# Altium PCB PCB1.PcbDoc
Units mil, origin at the board's own origin, x right, y up, seen from the top; angles counter-clockwise.
Board outline 6000 x 4000 mil, 2 copper layers (Top Layer, Bottom Layer); 23 components, 12 nets, 60 pads, 0 vias.
Unrouted connection lines stored in the file: 44.
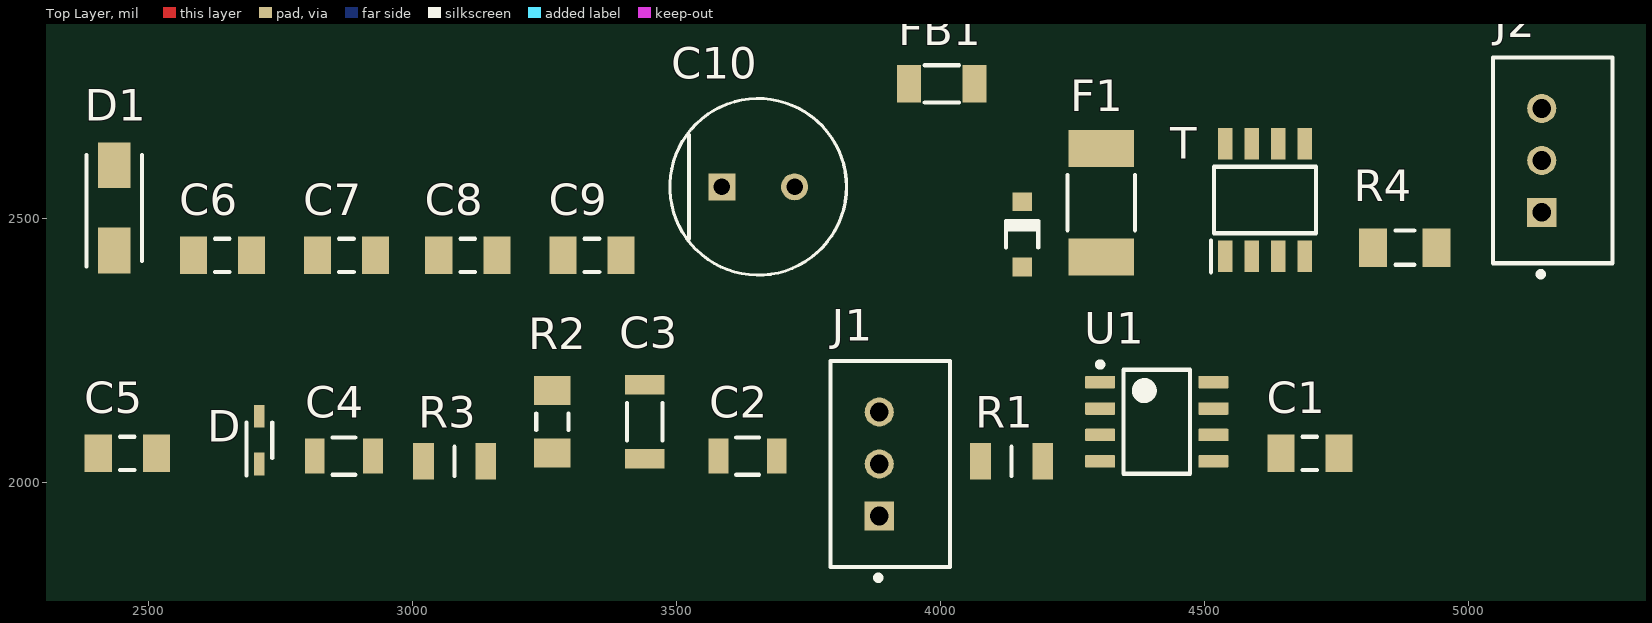
[diagram p0: Top Layer view]
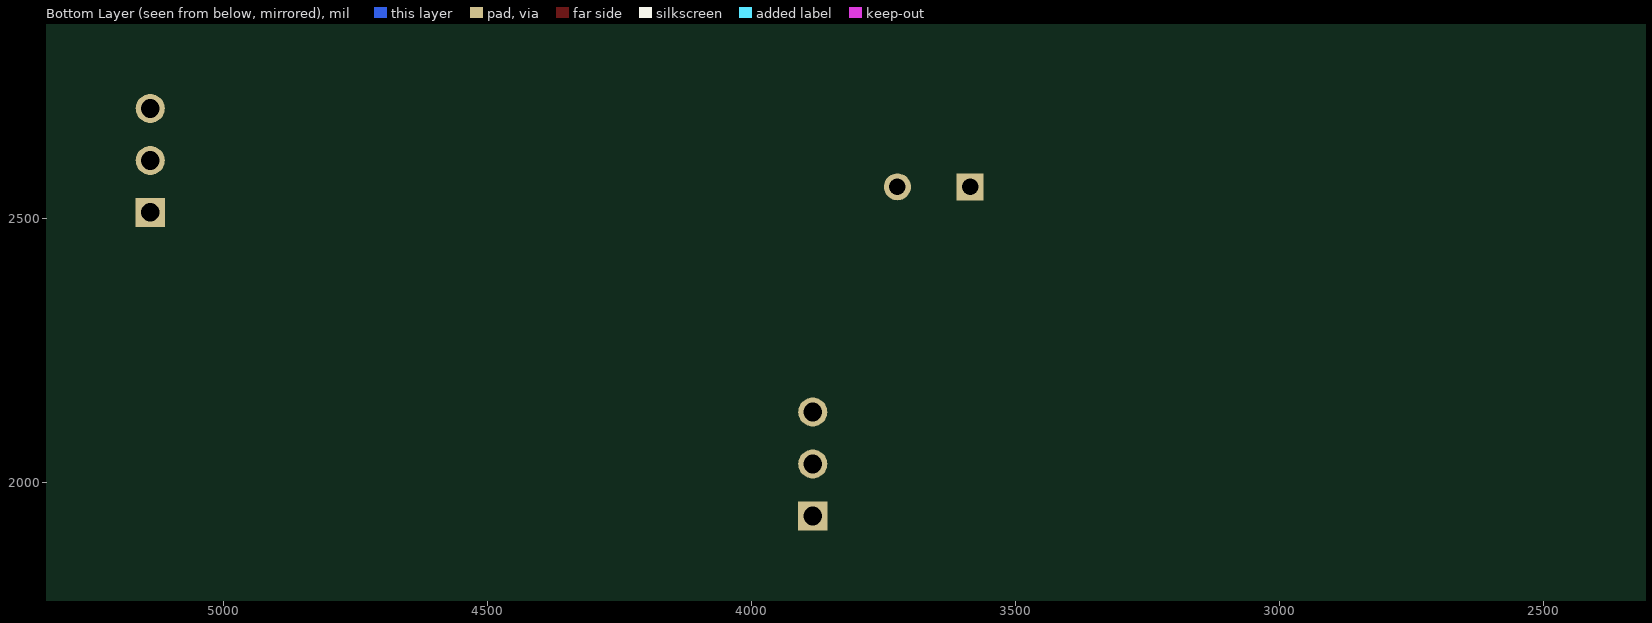
[diagram p1: Bottom Layer view, seen from below]

## Layer stack, top to bottom
Top Solder: solder mask 0.4, Solder Resist, Dk 3.5
Top Layer: signal copper 1.4
Dielectric 1: dielectric 12.6, FR-4, Dk 4.8
Bottom Layer: signal copper 1.4
Bottom Solder: solder mask 0.4, Solder Resist, Dk 3.5

## Board outline
1000,1000 7000,1000 7000,5000 1000,5000

## Design rules (kind name [scope] priority, off if disabled: settings)
Clearance [All] p1: gap=10 ignorepadtopadclearanceinfootprint=FALSE
PolygonConnect [All] p1: connectstyle=Relief reliefconductorwidth=10 reliefentries=4 polygonreliefangle="90 Angle" airgapwidth=10
RoutingVias [All] p1: holewidth=28 width=50 viastyle="Through Hole" minholewidth=28 minwidth=50 maxholewidth=28 maxwidth=50
SolderMaskExpansion [All] p1: expansion=0 istentingtop=FALSE
SupplyNets "Schematic Supply Nets_2" [InNet('+9_IN1')] p1: voltage=0.000
SupplyNets "Schematic Supply Nets_1" [InNet('GND')] p2: voltage=0.000
SupplyNets "Schematic Supply Nets" [InNet('VBIAS')] p3: voltage=0.000
Width [All] p1: maxlimit=10 minlimit=10 preferedwidth=10
30 further rules are at their usual default settings.

## Classes and differential pairs
component class CONNECTION: C1 C2 C3 C4 C5 D J1 R1 R2 R3 U1

## Components (designator, comment, footprint, x,y, rotation, side; value= is the part's Value field where it differs from the comment)
C1 "C1206C104K5RACTU" KEMT-1206-2_N 4700,2055 r0 top value=100nF
C2 "C1206C223J5GACTU" FP-C1206C-EB-MFG 3635,2050 r0 top value=22nF
C3 "Capacitor 1 uF +/- 10% 25 V 1206" CAPC3216X180X20ML20 3440,2115 r90 top value=1µF
C4 "C1206C101J5GACTU" FP-C1206C-EB-MFG 2870,2050 r0 top value=100pF
C5 "Capacitor 10 uF +/- 10% 16 V 1206" CAPC3216X180X50NL20T25 2460,2055 r0 top value=10µF
C6 "C1206C104K5RACTU" KEMT-1206-2_N 2640,2430 r0 top value=100nF
C7 "Capacitor 10 uF +/- 10% 16 V 1206" CAPC3216X180X50NL20T25 2875,2430 r0 top value=10µF
C8 "C1206C104K5RACTU" KEMT-1206-2_N 3105,2430 r0 top value=100nF
C9 "Capacitor 10 uF +/- 10% 16 V 1206" CAPC3216X180X50NL20T25 3340,2430 r0 top value=10µF
C10 "EEUFR1E221" FP-RAD-TH-D_8_0_5-L_11_5-MFG 3655,2560 r0 top value=220µF
D "PESD5V0V1BA,115" PESD5V0V1BA,115-Footprint-1 2715,2080 r90 top
D1 "SMAJ12A" SMAJ12A-Footprint-1 2435,2520 r90 top
F1 "1812L075/24DR" LFUS-1812L07524DR_V 4305,2530 r90 top
FB1 "BLM31PG121SN1L" FP-BLM31-0_2-t1_1-MFG 4002.99,2755 r0 top
J1 "B3B-XH-A(LF)(SN)" FP-B3B-XH-A_LF_SN-MFG 3905,2035 r90 top
J2 "B3B-XH-A(LF)(SN)" FP-B3B-XH-A_LF_SN-MFG 5160,2610 r90 top
R1 "RC1206FR-071ML" RC1206FR-071ML-Footprint-1 4135,2040 r0 top value=1M
R2 "Resistor 1k +/-1% 1206 250 mW" RESC3116X70X50ML13T20 3265,2115 r90 top value=1k
R3 "RC1206FR-0710ML" RC1206FR-0710ML-Footprint-1 3080,2040 r0 top value=10M
R4 "Resistor 100k +/-1% 1206 250 mW" RESC3216X60X45ML15T20 4880,2445 r0 top value=100k
T "SI4491EDY-T1-GE3" SI4491EDY-T1-GE3-Footprint-1 4625,2535 r90 top
U1 "OPA1652AIDR" D0008A_N 4410,2115 r0 top
? "BZT52C12-7-F" DIOD-SOD123-2_V 4155,2470 r90 top

## Footprints (in the part's own frame and the unit in brackets; to place one, negate y for a bottom-side part, rotate by r counter-clockwise, add the part's x,y. Pads: shape width x height; smd on the part's side, far side on the other; paste and mask are expansions set on the pad)
CAPC3216X180X20ML20 [mm] "Chip Capacitor, 2-Leads, Body 3.40x1.80mm, IPC Low Density"
  rect 0.95x1.9 smd: 1(-1.775,0) 2(1.775,0)
  silkscreen extent -0.9,-0.85 0.9,0.85, body extent -1.7,-0.9 1.7,0.9, height 1.8
CAPC3216X180X50NL20T25 [mm] "Chip Capacitor, 2-Leads, Body 3.40x1.80mm, IPC Medium Density"
  rect 1.3x1.8 smd: 1(-1.4,0) 2(1.4,0)
  silkscreen extent -0.35,-0.8 0.35,0.8, body extent -1.7,-0.9 1.7,0.9, height 1.8
D0008A_N [mm] "SOIC, 8-Leads, Body 5x4mm, Pitch 1.27mm, IPC Medium Density"
  rrect17% 1.45x0.6 smd: 1(-2.725,1.905) 2(-2.725,0.635) 3(-2.725,-0.635) 4(-2.725,-1.905) 5(2.725,-1.905) 6(2.725,-0.635) 7(2.725,0.635) 8(2.725,1.905)
  silkscreen extent -2.85,-2.5 1.6,2.88, body extent -3,-2.45 3,2.45, height 1.63
DIOD-SOD123-2_V [mm] "SOD123, 2-Leads, Body 2.7x1.55mm, Height 1.45mm"
  rect 0.9x0.95 smd: 1(-1.575,0) 2(1.575,0)
  silkscreen extent -0.64,-0.83 0.64,0.77, body extent -1.35,-0.77 1.35,0.77, height 1.45
FP-B3B-XH-A_LF_SN-MFG [mm]
  rect 1.4x1.4 hole 0.9 paste-2539.97 mask+0: 1(-2.5,0.525)
  round 1.4 hole 0.9 paste-2539.97 mask+0: 2(0,0.525) 3(2.5,0.525)
  silkscreen extent -5.6,-2.88 4.95,2.88, body extent -5.05,-2.98 5.05,2.98, height 0.25
FP-BLM31-0_2-t1_1-MFG [mm]
  rect 1.15x1.8 smd paste+0 mask+0: 1(-1.575,0) 2(1.575,0)
  silkscreen extent -0.82,-0.9 0.82,0.9, body extent -2.25,-1 2.25,1, height 0.25
FP-C1206C-EB-MFG [mm]
  rect 0.95x1.7 smd paste+0 mask+0: 1(-1.4,0) 2(1.4,0)
  silkscreen extent -0.55,-0.9 0.55,0.9, body extent -2,-1 2,1, height 0.25
FP-RAD-TH-D_8_0_5-L_11_5-MFG [mm]
  rect 1.3x1.3 hole 0.8 paste-2539.97 mask+0: 1(-1.75,0)
  round 1.3 hole 0.8 paste-2539.97 mask+0: 2(1.75,0)
  silkscreen extent -4.25,-4.25 4.25,4.25, body extent -4.35,-4.35 4.35,4.35, height 0.25
KEMT-1206-2_N [mm] "SMD, 2-Leads, Body 3.4x1.8mm, IPC Medium Density"
  rect 1.3x1.8 smd: 1(-1.4,0) 2(1.4,0)
  silkscreen extent -0.35,-0.8 0.35,0.8, body extent -1.7,-0.9 1.7,0.9, height 0.88
LFUS-1812L07524DR_V [mm] "SMD, 2-Leads, Body 4.55x3.24mm"
  rect 1.78x3.15 smd: 1(-2.615,0) 2(2.615,0)
  silkscreen extent -1.33,-1.62 1.33,1.62, body extent -2.27,-1.62 2.27,1.62, height 1.55
PESD5V0V1BA,115-Footprint-1 [mm]
  rect 1.1x0.5 smd: 1(-1.15,0.127) 2(1.15,0.127)
  silkscreen extent -1.7,-0.5 0.85,0.75, body extent -1.27,-0.51 1.22,0.74, height 0.94
RC1206FR-071ML-Footprint-1 [mm]
  rect 1x1.75 smd: 1(-1.5,0) 2(1.5,0)
  silkscreen extent 0,-0.7 0,0.7, body extent -1.55,-0.8 1.55,0.8, height 0.65
RC1206FR-0710ML-Footprint-1 [mm]
  rect 1x1.75 smd: 1(-1.5,0) 2(1.5,0)
  silkscreen extent 0,-0.7 0,0.7, body extent -1.55,-0.8 1.55,0.8, height 0.65
RESC3116X70X50ML13T20 [mm] "Chip Resistor, 2-Leads, Body 3.25x1.65mm, IPC Low Density"
  rect 1.4x1.75 smd: 1(-1.5,0) 2(1.5,0)
  silkscreen extent -0.4,-0.77 0.4,0.77, body extent -1.63,-0.82 1.63,0.82, height 0.7
RESC3216X60X45ML15T20 [mm] "Chip Resistor, 2-Leads, Body 3.3x1.75mm, IPC Low Density"
  rect 1.35x1.85 smd: 1(-1.525,0) 2(1.525,0)
  silkscreen extent -0.45,-0.82 0.45,0.82, body extent -1.65,-0.87 1.65,0.87, height 0.6
SI4491EDY-T1-GE3-Footprint-1 [mm]
  rect 1.525x0.7 smd: 1(-2.712,2.159) 2(-2.712,0.889) 3(-2.712,-0.381) 4(-2.712,-1.651) 5(2.712,-1.651) 6(2.712,-0.381) 7(2.712,0.889) 8(2.712,2.159)
  silkscreen extent -3.47,-2.2 1.6,2.86, body extent -3.13,-2.2 2.87,2.7, height 1.75
SMAJ12A-Footprint-1 [mm]
  rect 2.2x1.55 smd: 1(-2.05,0) 2(2.05,0)
  silkscreen extent -2.83,-1.33 2.55,1.33, body extent -2.55,-1.33 2.55,1.33, height 2.29

## Part data
C1 C6 C8: library part CMP-001-00104-1, "Multilayer Ceramic Capacitors MLCC - SMD/SMT 50V 0.1uF X7R 1206 10%", Case/Package=1206, Max Operating Temperature=125°C, Min Operating Temperature=-55°C, Tolerance=10%, Voltage Rating=50V, Mounting Technology="Surface Mount", Pins=2
C2: library part CMP-001-00103-1, "1206 (3216METRIC) Ceramic Capacitor SMD Comm C0G 50V 0.022MUF ±5% C0G NP0", Case/Package=1206, Max Operating Temperature=125°C, Min Operating Temperature=-55°C, Tolerance=5%, Voltage Rating=50V, Mounting Technology="Surface Mount", Pins=2
C3: library part CMP-001-00006-6, "Chip Capacitor, 1 uF, +/- 10%, 25 V, 1206 (3216 Metric)", Capacitor Type=Ceramic, Case/Package=1206, Max Operating Temperature=125°C, Min Operating Temperature=-55°C, Tolerance=10%, Voltage Rating=25V, Mounting Technology=SM, Pins=2, RoHS Compliant=True
C4: library part CMP-001-00102-1, "Multilayer Ceramic Capacitor, 100 pF, 50 V, ± 5%, C0G (NP0), 1206 [3216 Metric]", Case/Package=1206, Max Operating Temperature=125°C, Min Operating Temperature=-55°C, Tolerance=5%, Voltage Rating=50V, Mounting Technology="Surface Mount", Pins=2
C5 C7 C9: library part CMP-001-00016-6, "Chip Capacitor, 10 uF, +/- 10%, 16 V, 1206 (3216 Metric)", Capacitor Type=Ceramic, Case/Package=1206, Max Operating Temperature=125°C, Min Operating Temperature=-55°C, Tolerance=10%, Voltage Rating=16V, Mounting Technology=SM, Pins=2, RoHS Compliant=True
C10: library part CMP-001-00105-1, "Radial Can ALUMINUM ELECTROLYTIC CAPACITOR FR 25V 220muF ±20% 0.315Dia 8.00mm", Case/Package=Radial, Max Operating Temperature=105°C, Min Operating Temperature=-40°C, Ripple Current=950mA, Tolerance=20%, Voltage Rating=25V, Mounting Technology="Through Hole", Ripple Current (AC)=950mA
D: library part CMP-004-00039-1, "ESD protection diodes / TVS diodes; NEXPERIA; PESD5V0V1BA, 115; 12.5 V; 4.8 A; 5 V; 5.8 V", Max Operating Temperature=150°C, Min Operating Temperature=-55°C, Mounting Technology="Surface Mount", Pins=2
D1: library part CMP-004-00041-1, "SMAJ Series 19.9 V 0.4 kW Surface Mount Uni-Directional TVS Diode - DO-214AC", Forward Voltage=3.5V, Max Operating Temperature=150°C, Max Surge Current=20.1A, Min Operating Temperature=-65°C, Mounting Technology="Surface Mount", Pins=2
F1: library part CMP-005-00016-1, "PTC Resettable Fuse 0.75A(hold) 1.5A(trip) 24VDC 100A 0.8W 0.2s 0.11Ohm SMD Solder Pad 1812 T/R", Case/Package=1812, Current Rating=100A, Max Operating Temperature=85°C, Min Operating Temperature=-40°C, Mounting Technology="Surface Mount"
FB1: library part CMP-009-00180-1, "Ferrite Beads Multi-Layer 120Ohm 25% 100MHz 3.5A 0.02Ohm DCR 1206 T/R", Case/Package=1206, Max Operating Temperature=125°C, Min Operating Temperature=-55°C, Tolerance=25%, Mounting Technology="Surface Mount"
J1 J2: library part CMP-002-00074-1, "Connector Header, XH Series, 3 Position, 2.50mm, Through Hole, Press-Fit, Solder, Natural", Max Current Rating=3A, Max Operating Temperature=85°C, Min Operating Temperature=-25°C, Voltage Rating=250V, Connector Type="Male Pin", Gender=Male, Mounting Technology="Through Hole", Pins=3
R1: library part CMP-009-00186-1, "Res Thick Film 1206 1M Ohm 1% 0.25W(1/4W) ±100ppm/C Pad SMD T/R", Case/Package=1206, Max Operating Temperature=155°C, Min Operating Temperature=-55°C, Tolerance=1%, Voltage Rating=200V, Mounting Technology="Surface Mount", Pins=2
R2: library part CMP-009-00011-5, "Chip Resistor, 1 KOhm, +/- 1%, 0.25 W, -55 to 155 degC, 1206 (3216 Metric)", Case/Package=1206, Max Operating Temperature=155°C, Min Operating Temperature=-55°C, Power=250mW, Tolerance=1%, Voltage Rating=200V, Mounting Technology=SM, Pins=2, RoHS Compliant=True
R3: library part CMP-009-00185-1, "250mW Thick Film Resistors 200V ±100ppm/℃ ±1% 10MΩ 1206 Chip Resistor - Surface Mount ROHS", Case/Package=1206, Max Operating Temperature=155°C, Min Operating Temperature=-55°C, Tolerance=1%, Voltage Rating=200V, Mounting Technology="Surface Mount", Pins=2
R4: library part CMP-009-00025-5, "Chip Resistor, 100 KOhm, +/- 1%, 0.25 W, -55 to 155 degC, 1206 (3216 Metric)", Case/Package=1206, Max Operating Temperature=155°C, Min Operating Temperature=-55°C, Power=250mW, Tolerance=1%, Voltage Rating=200V, Mounting Technology=SM, Pins=2, RoHS Compliant=True
T: library part CMP-013-00037-1, "Mosfet P-ch 30V 17.3A 8-SO / Trans Mosfet P-ch 30V 17.3A 8-PIN So T/r", Case/Package=SOIC, Max Operating Temperature=150°C, Min Operating Temperature=-55°C, Mounting Technology="Surface Mount", Pins=8
U1: library part CMP-014-00008-1, "IC AUDIO 2 CIRCUIT 8SOIC Audio Amplifier 2 Circuit Rail-to-Rail 8-SOIC", Case/Package=SOIC, Max Operating Temperature=85°C, Max Supply Voltage=36V, Min Operating Temperature=-40°C, Min Supply Voltage=4.5V, Nominal Gain Bandwidth Product=18MHz, Pins=8
?: library part CMP-004-00040-1, "BZT52C12 Series 500 mW 12 V 10 mA Surface Mount Zener Diode - SOD-123", Forward Voltage=900mV, Max Operating Temperature=150°C, Min Operating Temperature=-65°C, Mounting Technology="Surface Mount", Pins=2

## Nets (pads, with @x,y where several pads share a name; then routed paths per layer and width w, separated by ;. In a path a pad name is that pad's centre, name@x,y a point inside that pad or via, vN(x,y) a via of type N, cw(c..) or ccw(c..) an arc to the next point about the centre after c; other vN are vias at no path point)
+9_IN1: C1.2 C3.1 C5.1 U1.8
+9V_RAW: C8.2 C9.2 C10.2 FB1.1
BUFFER_OUT: U1.1 U1.2
GND: C1.1 C3.2 C4.2 C5.2 C6.1 C7.1 C8.1 C9.1 C10.1 D1.2 D.2 J1.2 J1.3 J2.1 R3.2 R4.2 U1.4
Net_1: ?.1 R4.1 T.4
Net_2: ?.2 C6.2 C7.2 D1.1 FB1.2 T.1 T.2 T.3
NetC2_1: C2.1 C4.1 R2.2 R3.1
NetC2_2: C2.2 R1.1 U1.3
NetD_1: D.1 J1.1 R2.1
NetF1_1: F1.1 J2.2
NetF1_2: F1.2 T.5 T.6 T.7 T.8
VBIAS: R1.2
pads on no net: J2.3 U1.5 U1.6 U1.7